# Altium PCB Breakout_4pin.PcbDoc
Units mm, origin at the board's own origin, x right, y up, seen from the top; angles counter-clockwise.
Board outline 55 x 25 mm, 2 copper layers (Top Layer, Bottom Layer), stack 1.571 mm thick; 7 components, 4 nets, 20 pads, 0 vias.
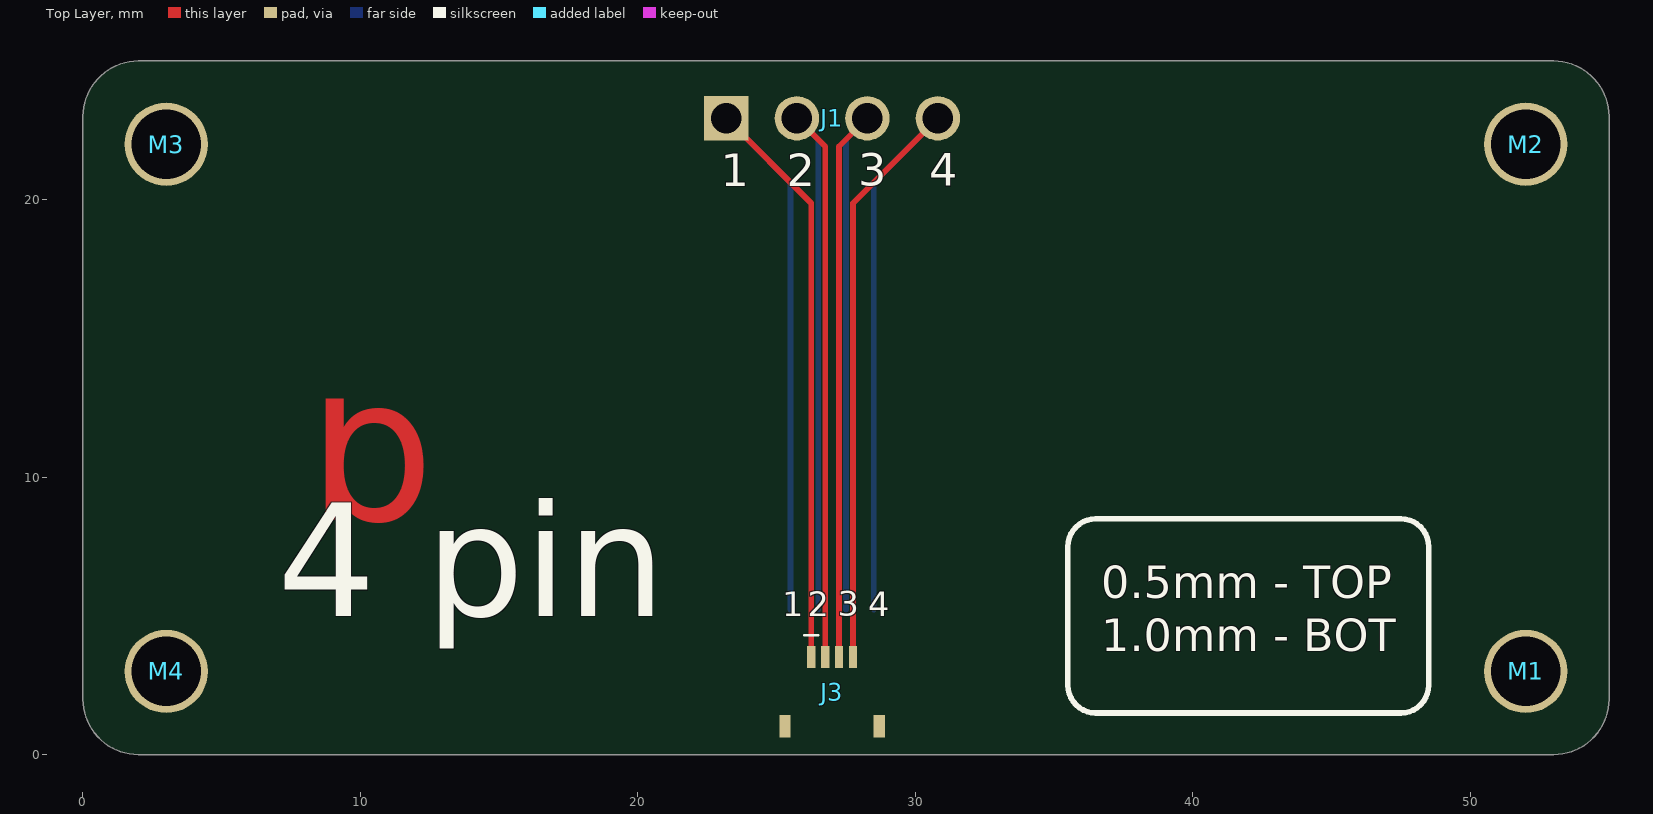
[diagram p0: Top Layer view]
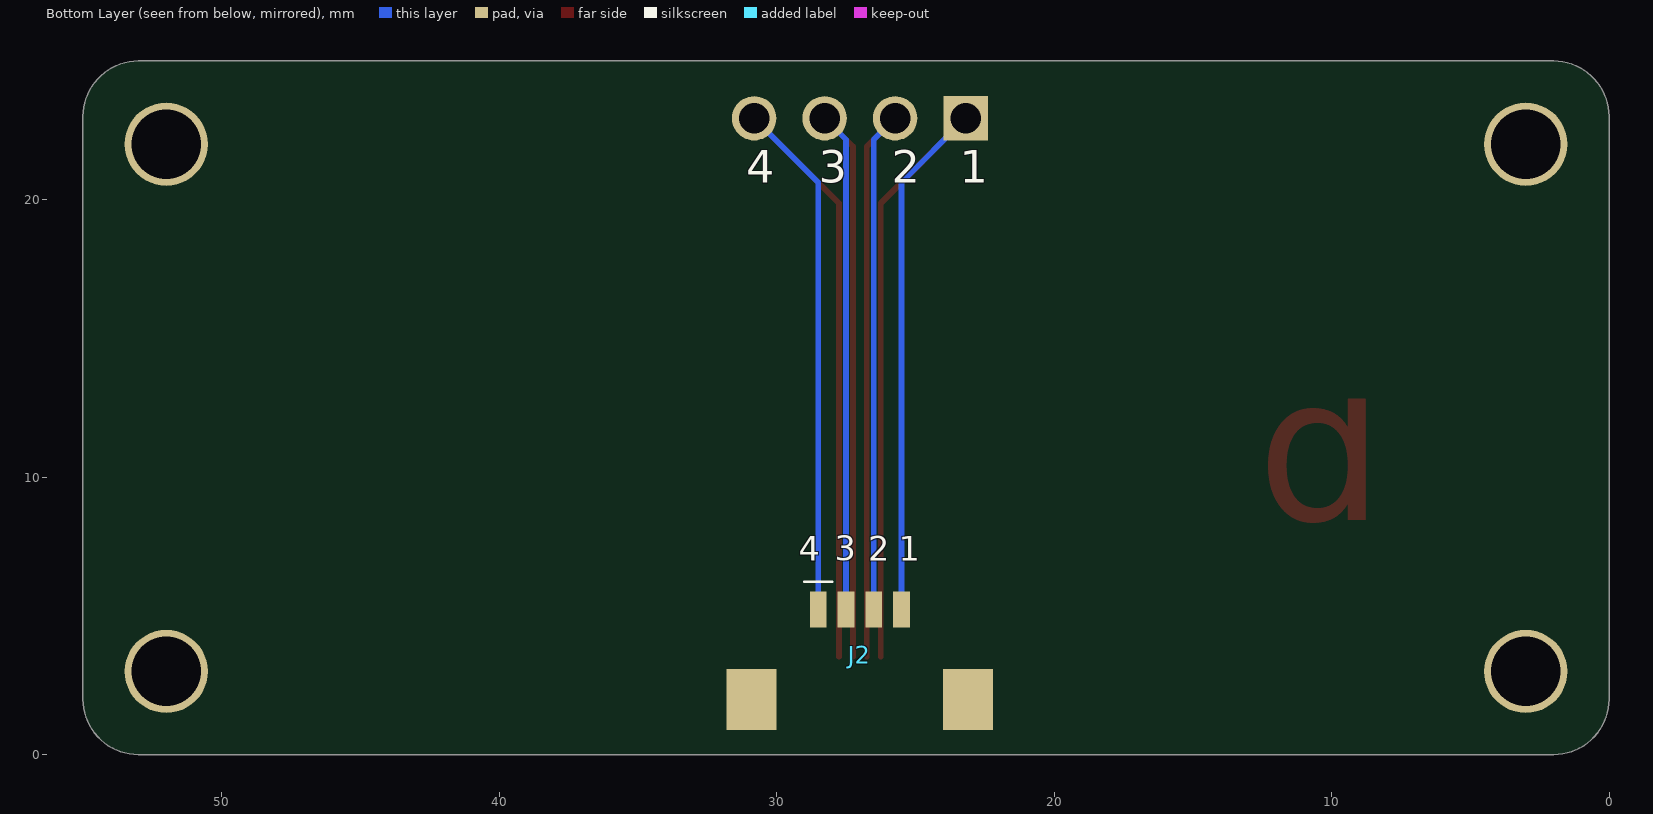
[diagram p1: Bottom Layer view, seen from below]

## Layer stack, top to bottom
Top Solder: solder mask 0.0102, Solder Resist, Dk 3.5
Top Layer: signal copper 0.0356
Dielectric 1: dielectric 1.5, FR-4, Dk 4.8
Bottom Layer: signal copper 0.0356
Bottom Solder: solder mask 0.0102, Solder Resist, Dk 3.5

## Board outline
2,0 cw(c2,2) 0,2 0,23 cw(c2,23) 2,25 53,25 cw(c53,23) 55,23 55,2 cw(c53,2) 53,0

## Design rules (kind name [scope] priority, off if disabled: settings)
Clearance [All] p1: gap=0.204 ignorepadtopadclearanceinfootprint=TRUE
DiffPairsRouting [All] p1: maxlimit=0.254 minlimit=0.064 mostfreqgap=0.127 toplayer_minwidth=0.178 toplayer_maxwidth=0.457 toplayer_prefwidth=0.457 bottomlayer_minwidth=0.178 bottomlayer_maxwidth=0.457 bottomlayer_prefwidth=0.457 impedanceprofiledriven=TRUE maxuncoupledlength=12.7
HoleSize [All] p1: absolutevalues=TRUE maxlimit=5 minlimit=0.153 maxpercent=80.000 minpercent=20.000
MinimumSolderMaskSliver [All] p1: minsoldermaskwidth=0.178
PolygonConnect [All] p1: connectstyle=Relief reliefconductorwidth=0.254 reliefentries=4 polygonreliefangle="90 Angle" airgapwidth=0.254
RoutingVias [All] p1: holewidth=0.305 width=0.61 viastyle="Through Hole" minholewidth=0.254 minwidth=0.508 maxholewidth=0.5 maxwidth=1.27
SolderMaskExpansion [All] p1: expansion=0.102 istentingtop=FALSE
Width [All] p1: maxlimit=25.4 minlimit=0.204 preferedwidth=0.254 minimp=50.000000 maximp=50.000000 favimp=50.000000
27 further rules are at their usual default settings.

## Components (designator, comment, footprint, x,y, rotation, side; value= is the part's Value field where it differs from the comment)
J1 "61300411121" HDR-V-1X4 27,22.935 r0 top
J2 "XF3M(1)-0415-1B" CONN-FFC-H-4P-1MM 27,3.829 r180 bottom
J3 "FFC2B28-04-G" CONN-FFC-H-4P-0.5MM 27,2.272 r0 top
M1 "MTG_HOLE" MH_P_2.5MM 52,3 r90 top
M2 "MTG_HOLE" MH_P_2.5MM 52,22 r90 top
M3 "MTG_HOLE" MH_P_2.5MM 3,22 r90 top
M4 "MTG_HOLE" MH_P_2.5MM 3,3 r90 top

## Footprints (in the part's own frame and the unit in brackets; to place one, negate y for a bottom-side part, rotate by r counter-clockwise, add the part's x,y. Pads: shape width x height; smd on the part's side, far side on the other; paste and mask are expansions set on the pad)
CONN-FFC-H-4P-0.5MM [mm]
  rect 0.3x0.8 smd: 1(-0.75,1.25) 2(-0.25,1.25) 3(0.25,1.25) 4(0.75,1.25)
  rect 0.4x0.8 smd: ME1(-1.7,-1.25) ME2(1.7,-1.25)
  silkscreen extent -1,2.03 -0.5,2.03, body extent -2,-1.8 2,1.45, height 1.76
CONN-FFC-H-4P-1MM [mm]
  rect 0.6x1.3 smd: 1(-1.5,1.4) 2(-0.5,1.4) 3(0.5,1.4) 4(1.5,1.4)
  rect 1.8x2.2 smd: ME1(-3.9,-1.85) ME2(3.9,-1.85)
  silkscreen extent -2,2.4 -1,2.4, body extent -4.3,-3.9 4.3,2.5, height 2.01
HDR-V-1X4 [mm]
  rect 1.6x1.6 hole 1.1: 1(-3.81,0)
  round 1.6 hole 1.1: 2(-1.27,0) 3(1.27,0) 4(3.81,0)
  body extent -5.08,-1.27 5.08,1.27, height 8.55
MH_P_2.5MM [mm]
  round 3 hole 2.5: 1(0,0)

## Part data
J1: library part HDR-V-1X4-M, "Header, 4-Pin, 0.1\"", Color=Black, Manufacturer 1="Wurth Electronics", Supplier Part Number 1=732-5317-ND, ComponentLink1Description=http://www.farnell.com/cad/1737268.pdf, ComponentLink1URL=http://www.farnell.com/cad/1737268.pdf, ComponentLink2Description=http://katalog.we-online.de/em/datasheet/6130xx11121.pdf, ComponentLink2URL=http://katalog.we-online.de/em/datasheet/6130xx11121.pdf, ComponentLink3Description=http://www.farnell.com/cad/1737268.pdf?src-supplier=Element14, ComponentLink3URL=http://www.farnell.com/cad/1737268.pdf?src-supplier=Element14, ComponentLink4Description=https://katalog.we-online.de/em/datasheet/6130xx11121.pdf?src-supplier=Digi-Key, ComponentLink4URL=https://katalog.we-online.de/em/datasheet/6130xx11121.pdf?src-supplier=Digi-Key, Connector Type="Male Pin", Contact Material=Copper, Contact Mating Length=0.236inch, Contact Plating=Gold, Gender=Male, Lead Free="Lead Free", Manufacturer Part Number 1=61300411121, Mount="Through Hole", Number of Contacts=4, Number of Positions=4, Number of Rows=1, Packaging=Bulk, Pitch=0.1inch, Pricing 1="1=0.18000, 10=0.15300, 25=0.12720, 50=0.10600, 100=0.09600, 1000=0.08800 (USD)", REACH SVHC=Unknown, RoHS=Yes, Stock 1=25747, Supplier 1=Digi-Key, Termination=Solder
J2: library part CONN-FFC-H-4P-1MM, "FFC & FPC Connectors RotaryBackLock 1.0mm Dual Contact 4pin", Actuator Color=Black, Current Rating=500mA, Flammability Rating="UL94 V-0", Housing Color=Natural, Insulation Resistance=100MR, Manufacturer 1=Omron, Max Operating Temperature=85°C, Min Operating Temperature=-30°C, Package Quantity=1, Voltage Rating=50V, Actuator Material="Polymer,Liquid Crystal Polymer", Category="FFC / FPC", ComponentLink1Description=https://datasheet.ciiva.com/29758/xf3m-0813-29758592.pdf?src-supplier=Digi-Key, ComponentLink1URL=https://datasheet.ciiva.com/29758/xf3m-0813-29758592.pdf?src-supplier=Digi-Key, ComponentLink2Description=https://datasheet.ciiva.com/29758/xf3m-0813-29758601.pdf?src-supplier=Digi-Key, ComponentLink2URL=https://datasheet.ciiva.com/29758/xf3m-0813-29758601.pdf?src-supplier=Digi-Key, ComponentLink3Description=https://datasheet.ciiva.com/43511/xf3m-0813-43511125.pdf?src-supplier=Onlinecomponents.com, ComponentLink3URL=https://datasheet.ciiva.com/43511/xf3m-0813-43511125.pdf?src-supplier=Onlinecomponents.com, Contact Location=Dual, Contact Material="Copper Alloy", Contact Plating=Gold, Gender=Female, Housing Material=Polymer, Lead Free="Lead Free", Manufacturer Part Number 1=XF3M(1)-0415-1B, Mating Cycles=20, Mounting Technology="Surface Mount", Number of Contacts=4, Number of Positions=4, Number of Rows=1, Orientation="Right Angle", Packaging="Tape and Reel", Pitch=1mm, Pricing 1="1500=0.6934, 3000=0.542, 6000=0.5365, 12000=0.5311, 15000=0.5257, 24000=0.5204, 30000=0.5152 (USD)", Radiation Hardening=No, RoHS=Yes, RoHS Compliant=Yes, Series=XF3M, Stock 1=10500, Supplier 1="Arrow Electronics", Supplier Part Number 1=XF3M(1)-0415-1B, Termination=Solder
J3: library part CONN-FFC-H-4P-0.5MM, "4W, 0.5MM Ffc Con, R/a, Dual Cont", Manufacturer 1="Global Connector Technology", Supplier Part Number 1=90AJ6003, Category=Connectors, Manufacturer Part Number 1=FFC2B28-04-G, Pricing 1="4000=0.276, 5000=0.253 (USD)", RoHS=No, Stock 1=4000, Supplier 1=Newark
M1 M2 M3 M4: "MTG HOLE PLATED VARIOUS SIZES"

## Nets (pads, with @x,y where several pads share a name; then routed paths per layer and width w, separated by ;. In a path a pad name is that pad's centre, name@x,y a point inside that pad or via, vN(x,y) a via of type N, cw(c..) or ccw(c..) an arc to the next point about the centre after c; other vN are vias at no path point)
NetJ1_1: J1.1 J2.4 J3.1 | length 39.3
  Top Layer w0.204: J1.1 26.25,19.875 J3.1
  Bottom Layer w0.204: J1.1 25.5,20.625 J2.4
NetJ1_2: J1.2 J2.3 J3.2 | length 37.9
  Top Layer w0.204: J1.2 26.75,21.915 J3.2
  Bottom Layer w0.204: J1.2 26.5,22.165 J2.3
NetJ1_3: J1.3 J2.2 J3.3 | length 37.9
  Top Layer w0.204: J3.3 27.25,21.915 J1.3
  Bottom Layer w0.204: J2.2 27.5,22.165 J1.3
NetJ1_4: J1.4 J2.1 J3.4 | length 39.3
  Top Layer w0.204: J3.4 27.75,19.875 J1.4
  Bottom Layer w0.204: J2.1 28.5,20.625 J1.4
pads on no net: J2.ME1 J2.ME2 J3.ME1 J3.ME2 M1.1 M2.1 M3.1 M4.1

## Other copper
Top Layer:
  text "b" at 8.1,5.6 h15

## Silkscreen, mask and mechanical layers (free items; w line width, h text height)
Top Overlay:
  lines w0.2: 35.5,2.5 ccw(c36.5,2.5) 36.5,1.5 47.5,1.5 ccw(c47.5,2.5) 48.5,2.5 48.5,7.5 ccw(c47.5,7.5) 47.5,8.5 36.5,8.5 ccw(c36.5,7.5) 35.5,7.5 35.5,2.5 ; 35.5,2.5 35.5,2.5
  text "3" at 27.937,20.107 h2
  text "1" at 22.99,20.098 h2
  text "2" at 25.37,20.098 h2
  text "4" at 30.5,20.1 h2
  text "0.5mm - TOP" at 36.7,5.238 h2
  text "3" at 27.21,4.716 h1.5
  text "1" at 25.2,4.7 h1.5
  text "2" at 26.116,4.7 h1.5
  text "4" at 28.3,4.7 h1.5
  text "4 pin" at 7,3.647 h7
  text "1.0mm - BOT" at 36.7,3.321 h2
  text "c" at 3.169,-11.643 h50
Bottom Overlay:
  text "1" at 23.4,20.212 h2
  text "2" at 25.844,20.212 h2
  text "3" at 28.474,20.221 h2
  text "4" at 31.1,20.214 h2
  text "1" at 25.6,6.7 h1.5
  text "2" at 26.701,6.7 h1.5
  text "3" at 27.91,6.716 h1.5
  text "4" at 29.2,6.7 h1.5
Board Outline:
  lines w0.1: 27,25 27.5,25 ; 0,2 ccw(c2,2) 2,0 53,0 ccw(c53,2) 55,2 55,23 ccw(c53,23) 53,25 2,25 ccw(c2,23) 0,23 0,2